# EAGLE board hand-pcb1 (EAGLE 7.5.0)

Size 100 x 80 mm. Coordinates in mm from the lower left corner, seen from the top.
Outline: 0,0 100,0 100,80 0,80 0,0
Copper layers (1*16): Top 0.035mm / dielectric 1.5mm / Bottom 0.035mm
Design rules "default": minimum track width 10mil, minimum drill 24mil, track to track 8mil, track to pad 8mil, pad to pad 8mil, via to via 8mil, smd to smd 8mil, copper to edge 40mil, drill to drill 8mil, minimum pad ring 10mil, minimum via ring 8mil, stop-mask expansion 4mil, vias tented up to drill 0mil, thermal gap 10mil

## Footprints (pad centres in the part's own frame; a part is rotated, then mirrored left to right if it is on the bottom)
C0603 = smd 1.1 x 1: 1 -0.85,0; 2 0.85,0
1X06 = drill 1.016 pad 1.88: 1 0,0; 2 2.54,0; 3 5.08,0; 4 7.62,0; 5 10.16,0; 6 12.7,0
SO16 = smd 0.6 x 2.2: 1 -4.445,-2.6; 2 -3.175,-2.6; 3 -1.905,-2.6; 4 -0.635,-2.6; 5 0.635,-2.6; 6 1.905,-2.6; 7 3.175,-2.6; 8 4.445,-2.6; 9 4.445,2.6; 10 3.175,2.6; 11 1.905,2.6; 12 0.635,2.6; 13 -0.635,2.6; 14 -1.905,2.6; 15 -3.175,2.6; 16 -4.445,2.6
M1206 = smd 1.6 x 2: 1 -1.4,0; 2 1.4,0
TSSOP28 = smd 0.305 x 0.991: 1 -4.225,-2.918; 2 -3.575,-2.918; 3 -2.925,-2.918; 4 -2.275,-2.918; 5 -1.625,-2.918; 6 -0.975,-2.918; 7 -0.325,-2.918; 8 0.325,-2.918; 9 0.975,-2.918; 10 1.625,-2.918; 11 2.275,-2.918; 12 2.925,-2.918; 13 3.575,-2.918; 14 4.225,-2.918; 15 4.225,2.918; 16 3.575,2.918; 17 2.925,2.918; 18 2.275,2.918; 19 1.625,2.918; 20 0.975,2.918; 21 0.325,2.918; 22 -0.325,2.918; 23 -0.975,2.918; 24 -1.625,2.918; 25 -2.275,2.918; 26 -2.925,2.918; 27 -3.575,2.918; 28 -4.225,2.918
TSSOP16 = smd 0.35 x 1.2: 1 -2.275,-2.925; 2 -1.625,-2.925; 3 -0.975,-2.925; 4 -0.325,-2.925; 5 0.325,-2.925; 6 0.975,-2.925; 7 1.625,-2.925; 8 2.275,-2.925; 9 2.275,2.925; 10 1.625,2.925; 11 0.975,2.925; 12 0.325,2.925; 13 -0.325,2.925; 14 -0.975,2.925; 15 -1.625,2.925; 16 -2.275,2.925
TEENSY32 = drill 1.016 pad 1.88: 3VB 1.27,5.08; 3VM 16.51,-2.54; 3VT -11.43,7.62; A10 -6.35,5.08; A11 -3.81,5.08; A12 -1.27,-5.08; A13 -1.27,5.08; A14 16.51,5.08; AGND -13.97,7.62; AREF -8.89,5.08; D0 -13.97,-7.62; D1 -11.43,-7.62; D2 -8.89,-7.62; D3 -6.35,-7.62; D4 -3.81,-7.62; D5 -1.27,-7.62; D6 1.27,-7.62; D7 3.81,-7.62; D8 6.35,-7.62; D9 8.89,-7.62; D10 11.43,-7.62; D11 13.97,-7.62; D12 16.51,-7.62; D13 16.51,7.62; D14 13.97,7.62; D15 11.43,7.62; D16 8.89,7.62; D17 6.35,7.62; D18 3.81,7.62; D19 1.27,7.62; D20 -1.27,7.62; D21 -3.81,7.62; D22 -6.35,7.62; D23 -8.89,7.62; D24 3.81,-5.08; D25 6.35,-5.08; D26 8.89,-5.08; D27 11.43,-5.08; D28 13.97,-5.08; D29 13.97,5.08; D30 11.43,5.08; D31 8.89,5.08; D32 6.35,5.08; D33 3.81,5.08; GNDB 1.27,-5.08; GNDM 16.51,0; GNDT -16.51,-7.62; PRG 16.51,2.54; VBAT 16.51,-5.08; VIN -16.51,7.62; VUSB -13.97,5.08

## Placement (x,y rotation side)
C1  10uF  [C0603]  20.32,76.2 0 top
C2  10uF  [C0603]  13.97,76.2 0 top
C3  10uF  [C0603]  7.62,76.2 0 top
C4  2.2uF  [C0603]  12.7,71.12 0 top
C5  2.2uF  [C0603]  6.35,71.12 0 top
C6  2.2uF  [C0603]  45.72,76.2 0 top
C7  .01uF  [C0603]  39.37,76.2 0 top
C8  .01uF  [C0603]  33.02,76.2 0 top
C9  .01uF  [C0603]  26.67,76.2 0 top
JP1  [1X06]  27.94,57.15 0 top
JP2  [1X06]  11.43,57.15 0 top
JP3  [1X06]  35.56,64.77 0 top
JP4  [1X06]  19.05,64.77 0 top
JP5  [1X06]  35.56,69.85 0 top
JP6  [1X06]  19.05,69.85 0 top
R1  [SO16]  43.18,31.75 270 top
R2  [SO16]  68.58,29.21 90 top
R3  0.15Ω  [M1206]  35.56,52.07 0 top
R4  0.15Ω  [M1206]  27.94,52.07 0 top
R5  0.15Ω  [M1206]  20.32,52.07 0 top
R6  0.15Ω  [M1206]  12.7,52.07 0 top
R7  0.15Ω  [M1206]  5.08,52.07 0 top
R8  0.15Ω  [M1206]  45.72,59.69 0 top
U1  [TSSOP28]  57.15,30.48 270 top
U$1  DRV8833  [TSSOP16]  33.02,43.18 0 top
U$2  DRV8833  [TSSOP16]  53.34,43.18 0 top
U$3  DRV8833  [TSSOP16]  67.31,44.45 0 top
U$4  TEENSY32  [TEENSY32]  52.07,13.97 0 top

## Library data of the parts
C1-C9 R3-R8 = resistor
JP1-JP6 U$4 = SparkFun
R1 R2 = resistor-bourns; OC_FARNELL: unknown; OC_NEWARK: unknown
U1 = adafruit
U$1-U$3 = texas

## Nets
+3V3: JP1.4 JP2.4 JP3.4 JP4.4 JP5.4 JP6.4 U$4.3VB U$4.3VM U$4.3VT U$4.AREF
GND: C1.2 C2.2 C3.2 C4.2 C5.2 C6.2 JP1.1 JP2.1 JP3.1 JP4.1 JP5.1 JP6.1 R3.2 R4.2 R5.2 R6.2 R7.2 R8.2 U1.14 U1.25 U$1.1 U$1.13 U$2.1 U$2.13 U$3.1 U$3.13 U$4.AGND U$4.GNDB U$4.GNDM U$4.GNDT
ME11: JP1.2 U$4.D0
ME12: JP1.3 U$4.D1
ME21: JP2.2 U$4.D2
ME22: JP2.3 U$4.D3
ME31: JP3.2 U$4.D4
ME32: JP3.3 U$4.D5
ME41: JP4.2 U$4.D6
ME42: U$4.D7
ME51: JP5.2 U$4.D8
ME52: JP5.3 U$4.D9
ME61: JP6.2 U$4.D10
ME62: JP6.3 U$4.D11
MP11: JP1.5 U$1.2
MP12: JP1.6 U$1.4
MP21: JP2.5 U$1.7
MP22: JP2.6 U$1.5
MP31: JP3.5 U$2.2
MP32: JP3.6 U$2.4
MP41: JP4.5 U$2.7
MP42: JP4.6 U$2.5
MP51: JP5.5 U$3.2
MP52: JP5.6 U$3.4
MP61: JP6.5 U$3.7
MP62: JP6.6 U$3.5
MS1: R3.1 U$1.3 U$4.A13
MS2: R4.1 U$1.6 U$4.A11
MS3: R5.1 U$2.3 U$4.A10
MS4: R6.1 U$2.6 U$4.D28
MS5: R7.1 U$3.3 U$4.D27
MS6: R8.1 U$3.6 U$4.D26
N$1: R1.9 U1.13
N$2: R1.10 U1.12
N$3: R1.11 U1.11
N$4: R1.12 U1.10
N$5: R1.13 U1.9
N$6: R1.14 U1.8
N$7: R1.15 U1.7
N$8: R1.16 U1.6
N$9: R2.9 U1.22
N$10: R2.10 U1.21
N$11: R2.11 U1.20
N$12: R2.12 U1.19
N$13: R2.13 U1.18
N$14: R2.14 U1.17
N$15: R2.15 U1.16
N$16: R2.16 U1.15
N$25: C4.1 U$1.14
N$28: C5.1 U$2.14
N$33: C6.1 U$3.14
PRG: U$4.PRG
PWM00: U$1.16
PWM01: U$1.15
PWM02: U$1.9
PWM03: U$1.10
PWM04: U$2.16
PWM05: U$2.15
PWM06: U$2.9
PWM07: U$2.10
PWM08: U$3.16
PWM09: U$3.15
PWM10: U$3.9
PWM11: U$3.10
SCL: U1.26 U$4.D19
SDA: U1.27 U$4.D18
V+: C7.1 C8.1 C9.1 U1.28 U$1.11 U$2.11 U$3.11
VBAT: U$4.VBAT
VIN: U$4.VIN
VM: C1.1 C2.1 C3.1 C7.2 C8.2 C9.2 U$1.12 U$2.12 U$3.12
VUSB: U$4.VUSB

## Tracks (layer width: path | path; a pad name or v marks a point on that pad's centre or on a via)
+3V3  (9 unrouted)
GND  (29 unrouted)
ME11  (1 unrouted)
ME12  (1 unrouted)
ME21  (1 unrouted)
ME22  (1 unrouted)
ME31  (1 unrouted)
ME32  (1 unrouted)
ME41  (1 unrouted)
ME51  (1 unrouted)
ME52  (1 unrouted)
ME61  (1 unrouted)
ME62  (1 unrouted)
MP11  (1 unrouted)
MP12  (1 unrouted)
MP21  (1 unrouted)
MP22  (1 unrouted)
MP31  (1 unrouted)
MP32  (1 unrouted)
MP41  (1 unrouted)
MP42  (1 unrouted)
MP51  (1 unrouted)
MP52  (1 unrouted)
MP61  (1 unrouted)
MP62  (1 unrouted)
MS1  (2 unrouted)
MS2  (2 unrouted)
MS3  (2 unrouted)
MS4  (2 unrouted)
MS5  (2 unrouted)
MS6  (2 unrouted)
N$1  (1 unrouted)
N$2  (1 unrouted)
N$3  (1 unrouted)
N$4  (1 unrouted)
N$5  (1 unrouted)
N$6  (1 unrouted)
N$7  (1 unrouted)
N$8  (1 unrouted)
N$9  (1 unrouted)
N$10  (1 unrouted)
N$11  (1 unrouted)
N$12  (1 unrouted)
N$13  (1 unrouted)
N$14  (1 unrouted)
N$15  (1 unrouted)
N$16  (1 unrouted)
N$25  (1 unrouted)
N$28  (1 unrouted)
N$33  (1 unrouted)
SCL  (1 unrouted)
SDA  (1 unrouted)
V+  (6 unrouted)
VM  (8 unrouted)